# Altium PCB PDP_V2_AUTO.PcbDoc
Units mil, origin at the board's own origin, x right, y up, seen from the top; angles counter-clockwise.
Board outline 5460 x 4800 mil, 2 copper layers (Top Layer, Bottom Layer); 52 components, 42 nets, 329 pads, 35 vias.
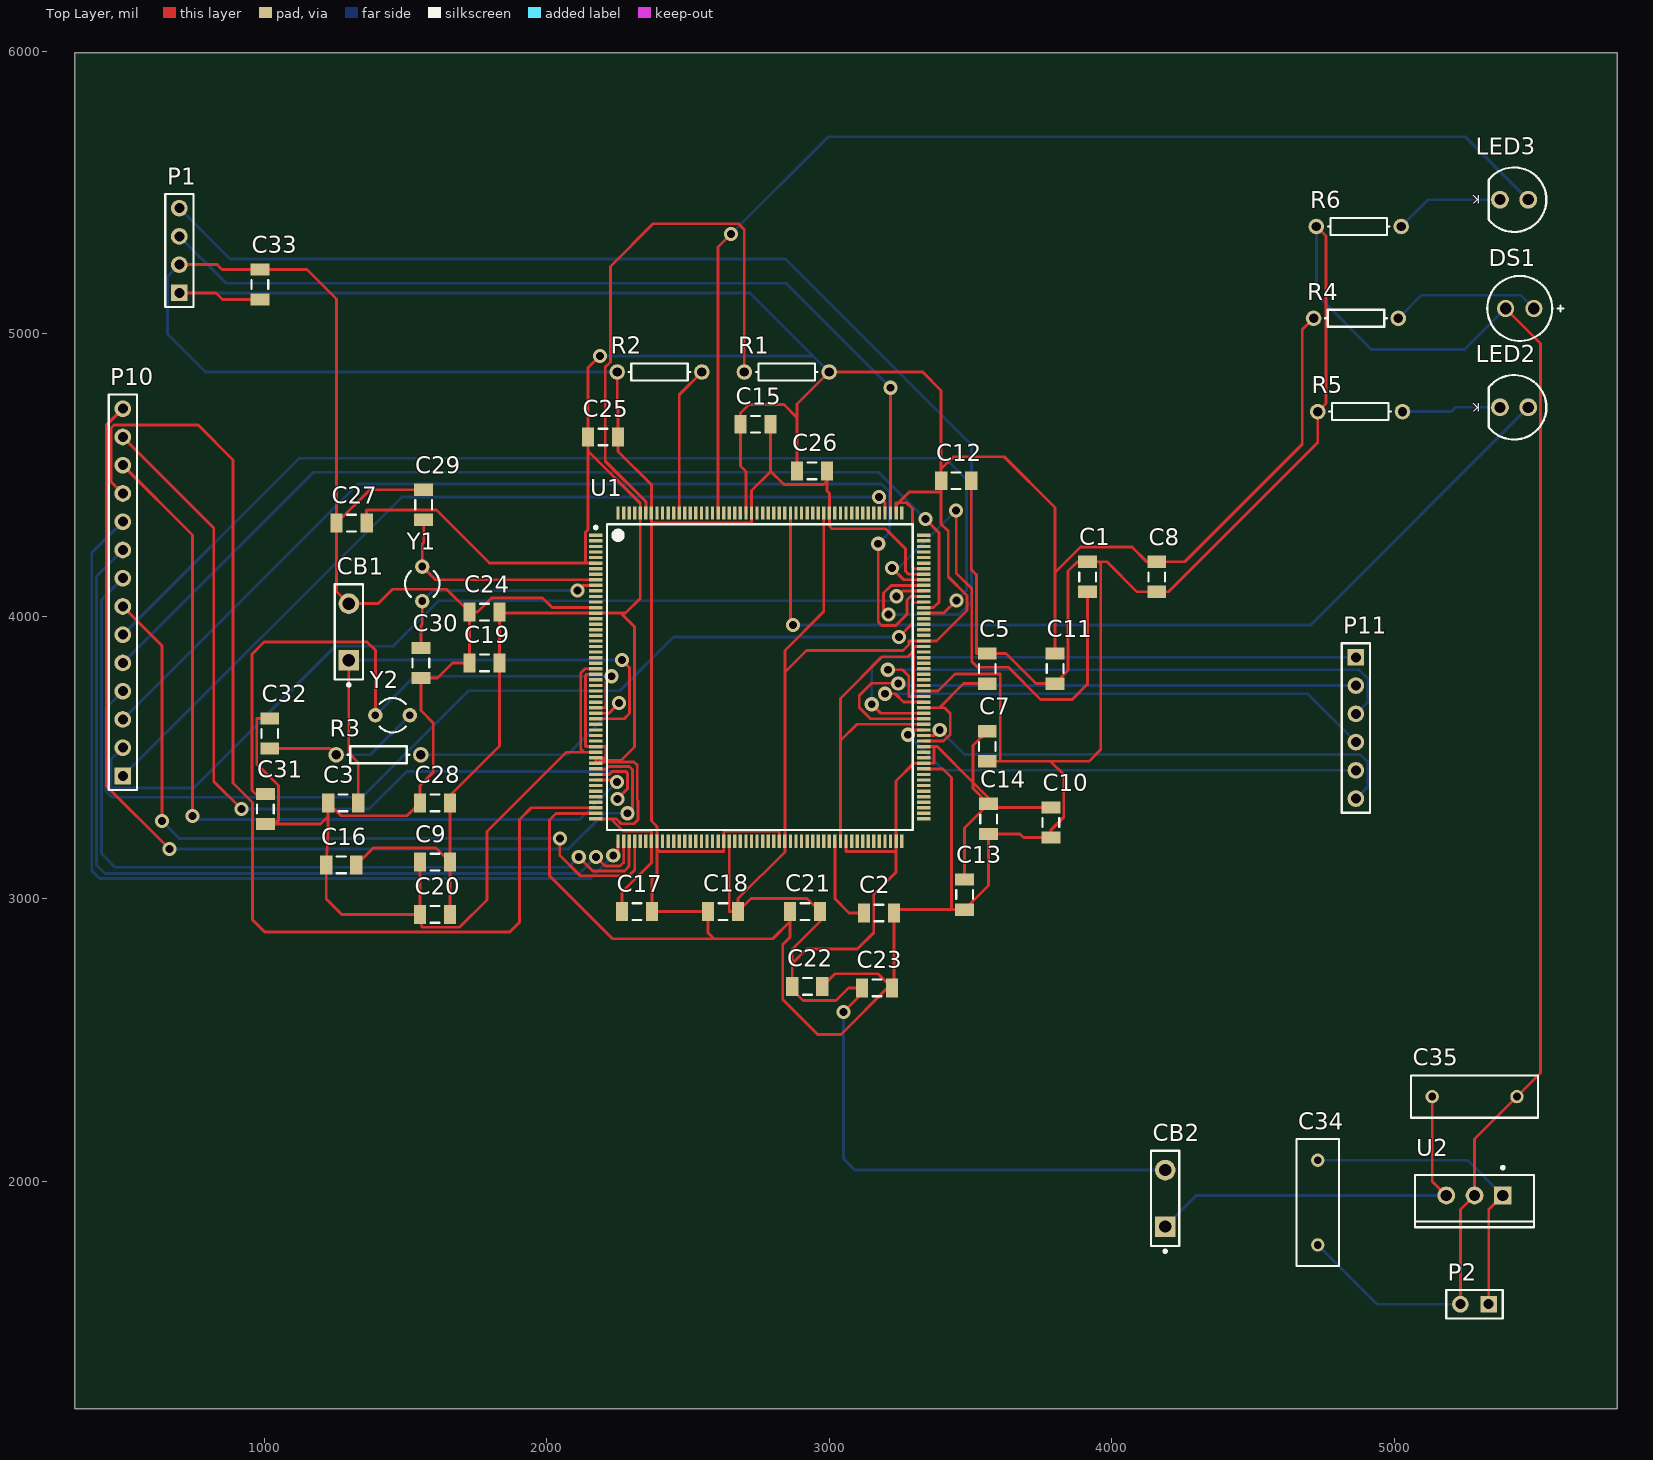
[diagram p0: Top Layer view]
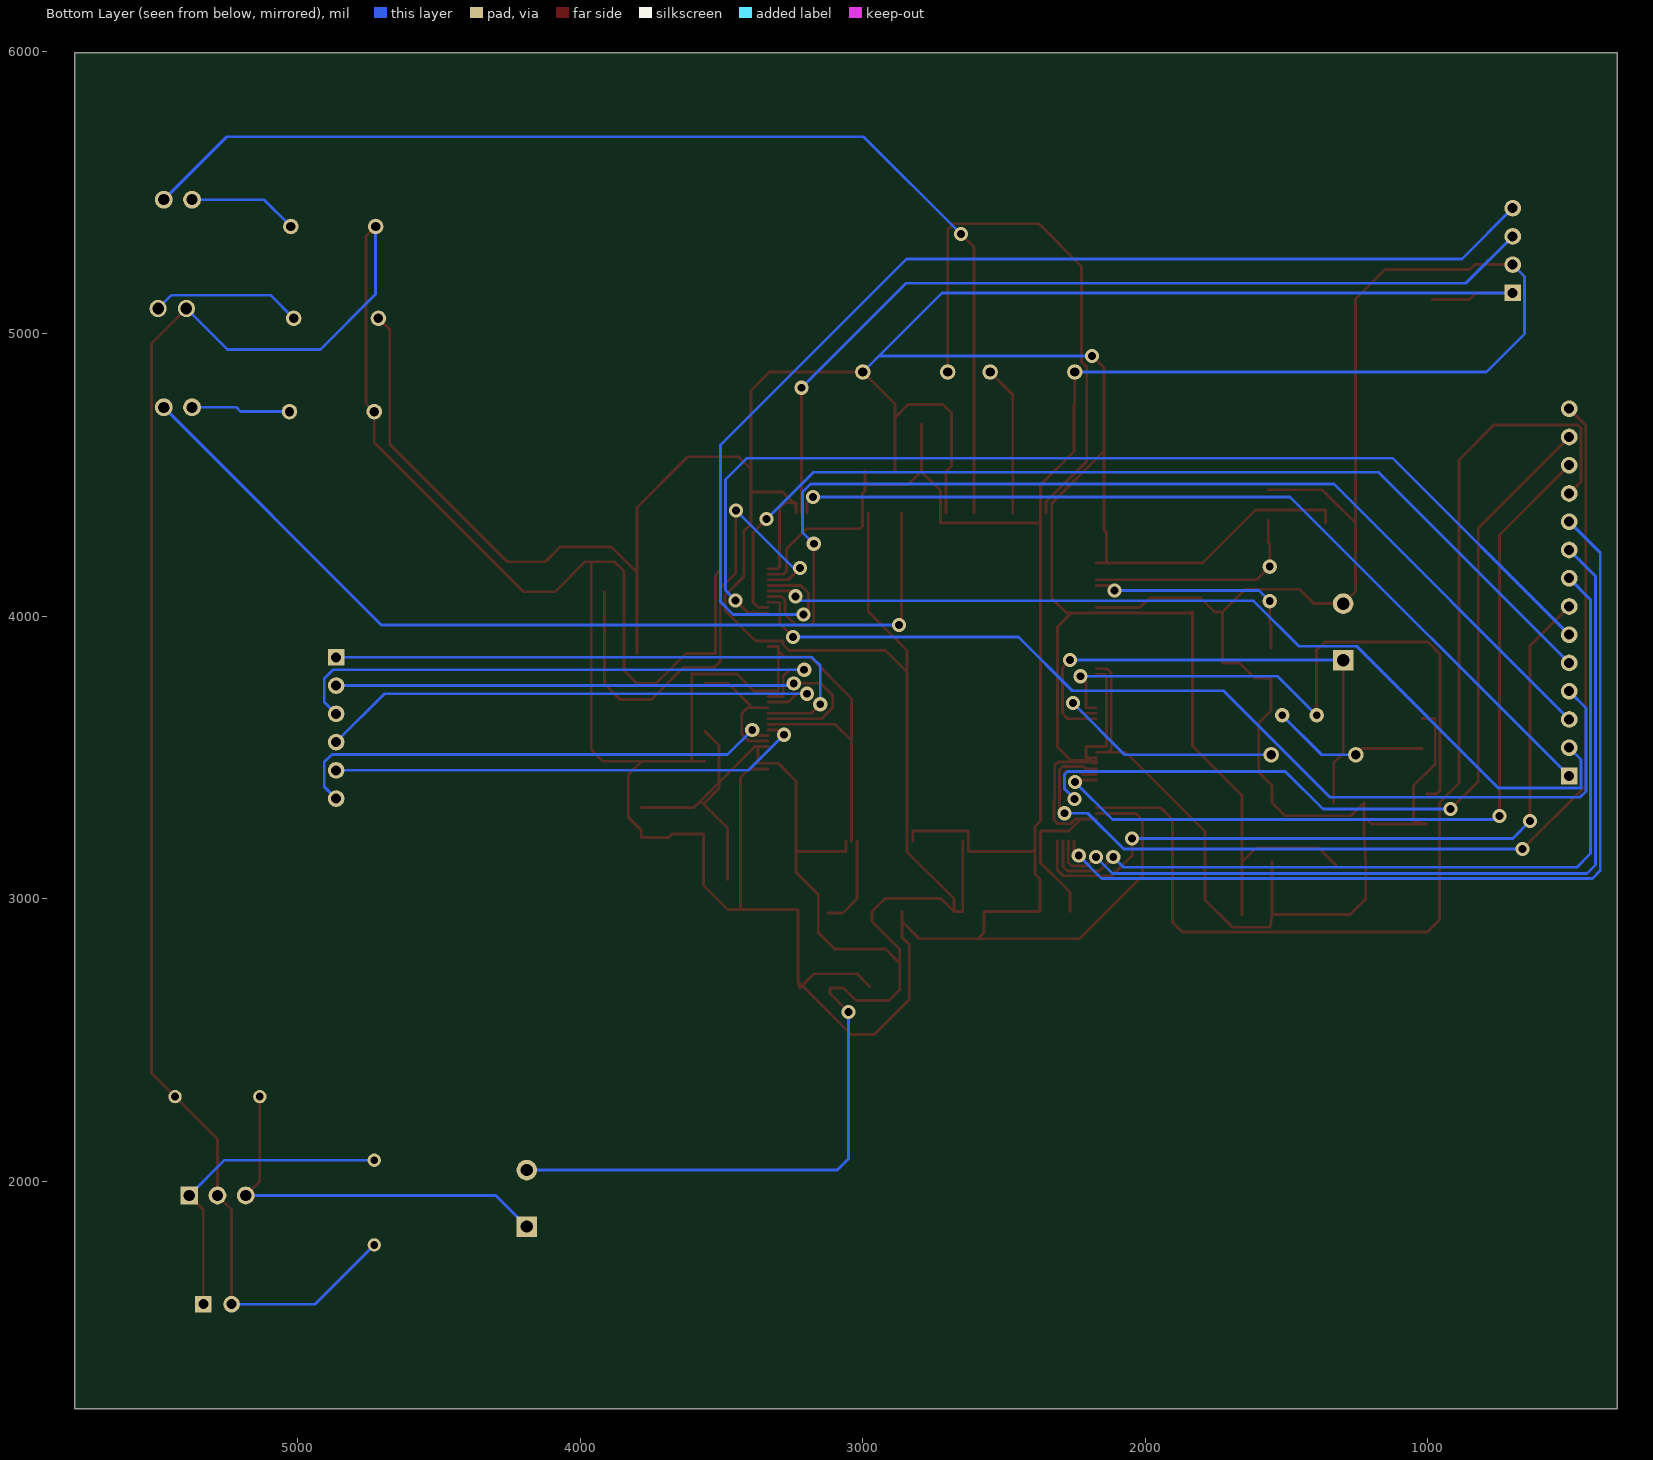
[diagram p1: Bottom Layer view, seen from below]

## Layer stack, top to bottom
Top Solder: solder mask 0.4, Solder Resist, Dk 3.5
Top Layer: signal copper 1.4
Dielectric 1: dielectric 12.6, FR-4, Dk 4.8
Bottom Layer: signal copper 1.4
Bottom Solder: solder mask 0.4, Solder Resist, Dk 3.5

## Board outline
330,1195 5790,1195 5790,5995 330,5995

## Design rules (kind name [scope] priority, off if disabled: settings)
Clearance [All] p1: gap=7 ignorepadtopadclearanceinfootprint=FALSE except(0: Arc-Hole Track-Hole SMDPad-Hole THPad-Hole Via-Hole Fill-Hole Poly-Hole Region-Hole Text-Hole)
PolygonConnect [All] p1: connectstyle=Relief reliefconductorwidth=10 reliefentries=4 polygonreliefangle="90 Angle" airgapwidth=10
RoutingVias [All] p1: holewidth=28 width=50 viastyle="Through Hole" minholewidth=28 minwidth=50 maxholewidth=28 maxwidth=50
SolderMaskExpansion [All] p1: expansion=4
Width [All] p1: maxlimit=10 minlimit=10 preferedwidth=10
30 further rules are at their usual default settings.

## Components (designator, comment, footprint, x,y, rotation, side; value= is the part's Value field where it differs from the comment)
C1 "VCAP2" C1206 3915,4140 r90 top value=2.2uF
C2 "VCAP1" C1206 3176.85,2950 r0 top value=2.2uF
C3 "NRST Cap" C1206 1280,3340 r0 top value=0.1uF
C5 "DSI_Filter2" C1206 3560,3815 r270 top value=2.2uF
C7 "DSI_Filter3" C1206 3560,3540 r90 top value=100nF
C8 "DSI_Filter3" C1206 4160,4140 r90 top value=100nF
C9 "DSI_Filter3" C1206 1605,3130 r0 top value=100nF
C10 "DSI_Filter3" C1206 3785,3270 r90 top value=100nF
C11 "DSI_Filter3" C1206 3800,3815 r90 top value=100nF
C12 "DSI_Filter3" C1206 3450,4480 r180 top value=100nF
C13 "DSI_Filter3" C1206 3480,3015 r90 top value=100nF
C14 "DSI_Filter3" C1206 3565,3283.15 r90 top value=100nF
C15 "DSI_Filter3" C1206 2740,4680 r180 top value=100nF
C16 "DSI_Filter3" C1206 1273.15,3120 r0 top value=100nF
C17 "DSI_Filter3" C1206 2320,2955 r180 top value=100nF
C18 "DSI_Filter3" C1206 2625,2955 r0 top value=100nF
C19 "DSI_Filter3" C1206 1780,3835 r0 top value=100nF
C20 "DSI_Filter3" C1206 1605,2945 r0 top value=100nF
C21 "DSI_Filter3" C1206 2915,2955 r0 top value=100nF
C22 "DSI_Filter3" C1206 2923.15,2690 r180 top value=100nF
C23 "DSI_Filter3" C1206 3170,2685 r180 top value=100nF
C24 "DSI_Filter3" C1206 1780,4015 r0 top value=100nF
C25 "DSI_Filter3" C1206 2200,4635 r180 top value=100nF
C26 "DSI_Filter3" C1206 2940,4515 r180 top value=100nF
C27 "DSI_Filter3" C1206 1310,4330 r0 top value=4.7uF
C28 "DSI_Filter3" C1206 1605,3340 r0 top value=1uF
C29 "DSI_Filter3" C1206 1565,4395 r90 top value=12.5pF
C30 "DSI_Filter3" C1206 1555,3835 r270 top value=12.5pF
C31 "DSI_Filter3" C1206 1005,3318.15 r90 top value=18pF
C32 "DSI_Filter3" C1206 1020,3585 r270 top value=18pF
C33 "DSI_Filter3" C1206 985,5175 r270 top value=100nF
C34 "Cap" RAD-0.3 4730,1925 r90 top value=0.47uF
C35 "Cap" RAD-0.3 5285,2300 r180 top value=33uF
CB1 "Reset Button" SPST-2 1300,3945 r90 top
CB2 "REG_PWR" SPST-2 4190,1940 r90 top
DS1 "PWR_LED" AVAG-HLMP-4740 5445,5090 r180 top
LED2 "STATUS1" "Type 5mm" 5425,4740 r180 top
LED3 "STATUS2" "Type 5mm" 5425,5475 r180 top
P1 "Header 4" HDR1X4 700,5145 r90 top
P2 "Header 2" HDR1X2 5335,1565 r180 top
P10 "Header 14" HDR1X14 500,3435 r90 top
P11 "Header 6" HDR1X6 4865,3855 r270 top
R1 "PDR_Pullup" AXIAL-0.3 2850,4865 r0 top value=10K
R2 "BOOT_Pulldown" AXIAL-0.3 2400,4865 r0 top value=10K
R3 "Inverter_Lim" AXIAL-0.3 1405,3510 r0 top value=100
R4 "Inverter_Lim" AXIAL-0.3 4865,5055 r0 top value=100
R5 "Inverter_Lim" AXIAL-0.3 4880,4725 r180 top value=100
R6 "Inverter_Lim" AXIAL-0.3 4875,5380 r180 top value=100
U1 "STM32F769BIT6" STM-LQFP208_V 2755,3785 r0 top
U2 "LM3940IT-3.3" NDE0003A 5285,1950 r180 top
Y1 "XTAL 32.768 kHz" R38 1560,4115 r0 top
Y2 "XTAL 25 MHz" R38 1455,3650 r90 top

## Footprints (in the part's own frame and the unit in brackets; to place one, negate y for a bottom-side part, rotate by r counter-clockwise, add the part's x,y. Pads: shape width x height; smd on the part's side, far side on the other; paste and mask are expansions set on the pad)
AVAG-HLMP-4740 [mm] "THD, 2-Leads, Dia 5.845mm, Pitch 2.54mm"
  round 1.55 hole 1.05: 1(-1.27,0) 2(1.27,0)
  silkscreen extent -3.92,-2.92 2.92,2.92
AXIAL-0.3 [mm] "Axial Device, Thru-Hole; 2 Leads; 0.3 in Pin Spacing"
  round 1.4 hole 0.85: 1(-3.81,0) 2(3.81,0)
  silkscreen extent -2.77,-0.76 2.77,0.76
C1206 [mm] "Chip Capacitor, Body 3.2x1.6mm, IPC High Density"
  rect 1.1x1.7 smd: 1(-1.35,0) 2(1.35,0)
  silkscreen extent -0.4,-0.75 0.4,0.75, body extent -1.7,-0.9 1.7,0.9, height 1.3
HDR1X2 [mm] "Connector; Header; 2 Position"
  rect 1.5x1.5 hole 0.9: 1(0,0)
  round 1.5 hole 0.9: 2(2.54,0)
  silkscreen extent -1.27,-1.27 3.81,1.27
HDR1X4 [mm] "Connector; Header; 4 Position"
  rect 1.5x1.5 hole 0.9: 1(0,0)
  round 1.5 hole 0.9: 2(2.54,0) 3(5.08,0) 4(7.62,0)
  silkscreen extent -1.27,-1.27 8.89,1.27
HDR1X6 [mm] "Connector; Header; 6 Position"
  rect 1.5x1.5 hole 0.9: 1(0,0)
  round 1.5 hole 0.9: 2(2.54,0) 3(5.08,0) 4(7.62,0) 5(10.16,0) 6(12.7,0)
  silkscreen extent -1.27,-1.27 13.97,1.27
HDR1X14 [mm] "Connector; Header; 14 Position"
  rect 1.5x1.5 hole 0.9: 1(0,0)
  round 1.5 hole 0.9: 2(2.54,0) 3(5.08,0) 4(7.62,0) 5(10.16,0) 6(12.7,0) 7(15.24,0) 8(17.78,0) 9(20.32,0) 10(22.86,0) 11(25.4,0) 12(27.94,0) 13(30.48,0) 14(33.02,0)
  silkscreen extent -1.27,-1.27 34.29,1.27
NDE0003A [mm] "FM, 3-Leads, Body 10.7x4.7mm, Pitch 2.54mm"
  rect 1.6x1.6 hole 1: 1(-2.54,0)
  round 1.6 hole 1: 2(0,0) 3(2.54,0)
  silkscreen extent -5.35,-2.62 5.35,2.85, body extent -5.4,-1.9 5.4,2.9, height 19.4
R38 [mm] "Crystal, Thru-Hole; 2 Leads; Body 3.1 x 8.2 mm (Dia.xH)"
  round 1.3 hole 0.7: 1(0,1.55) 2(0,-1.55)
  silkscreen extent -1.55,-1.19 1.55,1.17
RAD-0.3 [mm] "Radial Cap, Thru-Hole; 2 Leads; 0.3 in Pin Spacing"
  round 1.2 hole 0.7: 1(-3.81,0) 2(3.81,0)
  silkscreen extent -5.71,-1.91 5.71,1.91
SPST-2 [mm] "Switch; 2 Leads"
  rect 1.85x1.85 hole 1.1: 1(-2.54,0)
  round 1.85 hole 1.1: 2(2.54,0)
  silkscreen extent -4.89,-1.27 4.28,1.27
STM-LQFP208_V [mm] "QFP, 208-Leads, Body 28x28mm, Pitch 0.5mm"
  rect 1.2x0.3 smd: 1(-14.75,12.75) 2(-14.75,12.25) 3(-14.75,11.75) 4(-14.75,11.25) 5(-14.75,10.75) 6(-14.75,10.25) 7(-14.75,9.75) 8(-14.75,9.25) 9(-14.75,8.75) 10(-14.75,8.25) 11(-14.75,7.75) 12(-14.75,7.25) 13(-14.75,6.75) 14(-14.75,6.25) 15(-14.75,5.75) 16(-14.75,5.25) 17(-14.75,4.75) 18(-14.75,4.25) 19(-14.75,3.75) 20(-14.75,3.25) 21(-14.75,2.75) 22(-14.75,2.25) 23(-14.75,1.75) 24(-14.75,1.25) 25(-14.75,0.75) 26(-14.75,0.25) 27(-14.75,-0.25) 28(-14.75,-0.75) 29(-14.75,-1.25) 30(-14.75,-1.75) 31(-14.75,-2.25) 32(-14.75,-2.75) 33(-14.75,-3.25) 34(-14.75,-3.75) 35(-14.75,-4.25) 36(-14.75,-4.75) 37(-14.75,-5.25) 38(-14.75,-5.75) 39(-14.75,-6.25) 40(-14.75,-6.75) 41(-14.75,-7.25) 42(-14.75,-7.75) 43(-14.75,-8.25) 44(-14.75,-8.75) 45(-14.75,-9.25) 46(-14.75,-9.75) 47(-14.75,-10.25) 48(-14.75,-10.75) 49(-14.75,-11.25) 50(-14.75,-11.75) 51(-14.75,-12.25) 52(-14.75,-12.75) 105(14.75,-12.75) 106(14.75,-12.25) 107(14.75,-11.75) 108(14.75,-11.25) 109(14.75,-10.75) 110(14.75,-10.25) 111(14.75,-9.75) 112(14.75,-9.25) 113(14.75,-8.75) 114(14.75,-8.25) 115(14.75,-7.75) 116(14.75,-7.25) 117(14.75,-6.75) 118(14.75,-6.25) 119(14.75,-5.75) 120(14.75,-5.25) 121(14.75,-4.75) 122(14.75,-4.25) 123(14.75,-3.75) 124(14.75,-3.25) 125(14.75,-2.75) 126(14.75,-2.25) 127(14.75,-1.75) 128(14.75,-1.25) 129(14.75,-0.75) 130(14.75,-0.25) 131(14.75,0.25) 132(14.75,0.75) 133(14.75,1.25) 134(14.75,1.75) 135(14.75,2.25) 136(14.75,2.75) 137(14.75,3.25) 138(14.75,3.75) 139(14.75,4.25) 140(14.75,4.75) 141(14.75,5.25) 142(14.75,5.75) 143(14.75,6.25) 144(14.75,6.75) 145(14.75,7.25) 146(14.75,7.75) 147(14.75,8.25) 148(14.75,8.75) 149(14.75,9.25) 150(14.75,9.75) 151(14.75,10.25) 152(14.75,10.75) 153(14.75,11.25) 154(14.75,11.75) 155(14.75,12.25) 156(14.75,12.75)
  rect 0.3x1.2 smd: 53(-12.75,-14.75) 54(-12.25,-14.75) 55(-11.75,-14.75) 56(-11.25,-14.75) 57(-10.75,-14.75) 58(-10.25,-14.75) 59(-9.75,-14.75) 60(-9.25,-14.75) 61(-8.75,-14.75) 62(-8.25,-14.75) 63(-7.75,-14.75) 64(-7.25,-14.75) 65(-6.75,-14.75) 66(-6.25,-14.75) 67(-5.75,-14.75) 68(-5.25,-14.75) 69(-4.75,-14.75) 70(-4.25,-14.75) 71(-3.75,-14.75) 72(-3.25,-14.75) 73(-2.75,-14.75) 74(-2.25,-14.75) 75(-1.75,-14.75) 76(-1.25,-14.75) 77(-0.75,-14.75) 78(-0.25,-14.75) 79(0.25,-14.75) 80(0.75,-14.75) 81(1.25,-14.75) 82(1.75,-14.75) 83(2.25,-14.75) 84(2.75,-14.75) 85(3.25,-14.75) 86(3.75,-14.75) 87(4.25,-14.75) 88(4.75,-14.75) 89(5.25,-14.75) 90(5.75,-14.75) 91(6.25,-14.75) 92(6.75,-14.75) 93(7.25,-14.75) 94(7.75,-14.75) 95(8.25,-14.75) 96(8.75,-14.75) 97(9.25,-14.75) 98(9.75,-14.75) 99(10.25,-14.75) 100(10.75,-14.75) 101(11.25,-14.75) 102(11.75,-14.75) 103(12.25,-14.75) 104(12.75,-14.75) 157(12.75,14.75) 158(12.25,14.75) 159(11.75,14.75) 160(11.25,14.75) 161(10.75,14.75) 162(10.25,14.75) 163(9.75,14.75) 164(9.25,14.75) 165(8.75,14.75) 166(8.25,14.75) 167(7.75,14.75) 168(7.25,14.75) 169(6.75,14.75) 170(6.25,14.75) 171(5.75,14.75) 172(5.25,14.75) 173(4.75,14.75) 174(4.25,14.75) 175(3.75,14.75) 176(3.25,14.75) 177(2.75,14.75) 178(2.25,14.75) 179(1.75,14.75) 180(1.25,14.75) 181(0.75,14.75) 182(0.25,14.75) 183(-0.25,14.75) 184(-0.75,14.75) 185(-1.25,14.75) 186(-1.75,14.75) 187(-2.25,14.75) 188(-2.75,14.75) 189(-3.25,14.75) 190(-3.75,14.75) 191(-4.25,14.75) 192(-4.75,14.75) 193(-5.25,14.75) 194(-5.75,14.75) 195(-6.25,14.75) 196(-6.75,14.75) 197(-7.25,14.75) 198(-7.75,14.75) 199(-8.25,14.75) 200(-8.75,14.75) 201(-9.25,14.75) 202(-9.75,14.75) 203(-10.25,14.75) 204(-10.75,14.75) 205(-11.25,14.75) 206(-11.75,14.75) 207(-12.25,14.75) 208(-12.75,14.75)
  silkscreen extent -14.87,-13.75 13.75,13.75, body extent -15,-15 15,15, height 1.6
"Type 5mm" [mm] "THT, LED-5mm, 2pin- Body 5.8mm"
  round 1.6 hole 1: 1(1.27,0) 2(-1.27,0)
  silkscreen extent -2.9,-2.9 2.29,2.9, body extent -2.9,-2.9 2.5,2.9, height 11.7

## Part data
C1 C2 C3 C5 C7 C8 C9 C10 C11 C12 C13 C14 C15 C16 C17 C18 C19 C20 C21 C22 C23 C24 C25 C26 C27 C28 C29 C30 C31 C32 C33: library part "Cap Semi", "Capacitor (Semiconductor SIM Model)", LatestRevisionDate=29-May-2009, LatestRevisionNote="IPC-7351 Footprint Added.", PackageDescription="Chip Capacitor", PackageReference=C1206, Published=8-Jun-2000, Publisher="Altium Limited"
C34 C35: "Capacitor", LatestRevisionDate=17-Jul-2002, LatestRevisionNote="Re-released for DXP Platform.", PackageDescription="Radial Cap, Thru-Hole; 2 Leads; 0.3 in Pin Spacing", PackageReference=RAD-0.3, Published=8-Jun-2000, Publisher="Altium Limited"
CB1 CB2: library part "Circuit Breaker", "Circuit Breaker", LatestRevisionDate=17-Jul-2002, LatestRevisionNote="Re-released for DXP Platform.", PackageDescription="Switch; 2 Leads", PackageReference=SPST-2, Published=24-Mar-1999, Publisher="Altium Limited"
DS1: library part CMP-2000-06413-1, "T-1 3/4 (5 mm) Low Current LED Lamp, Green, 1.9 V, -20 to 100 degC, 2-Pin THD, RoHS, Bulk", Color=Green, Dominant Wavelength/Color Temperature=569nm, Manufacturer=AvagoTechnologies, Package=2T-13/4, Package Description="2-Pin Through Hole Device, Dia 5.845 mm, Pitch 2.54 mm", Package Reference=HLMP-4740, Category=LEDs, Datasheet URL=http://docs.avagotech.com/docs/AV02-1557EN, Datasheet Version=07/2014, Intensity=2.3mcd, Lens Appearance=ColoredDiffused, Lens Shape Type=Circular, Manufacturer URL=http://www.avagotech.com/, Mounting=ThroughHole, Mounting Orientation=TopMount, Mounting Technology=ThroughHole, Number of LEDs=1, Packaging=Bulk, Peak Wavelength=565nm, Pin Count=2, Rad Hard=No, Type=Uni-Color, Viewing Angle=50°
LED2 LED3: library part CMP-1489-00006-1, "THT LED round mono-color waterclear, WL-TMRW ,Blue", Emitting color=Blue, Manufacturer="Wuerth Elektronik", PartNumber=151053BS04500, ComponentLink1Description="Manufacturer URL", ComponentLink1URL=http://www.we-online.com, ComponentLink2Description=Datasheet, ComponentLink2URL=http://katalog.we-online.de/pbs/datasheet/7448042001.pdfhttp://katalog.we-online.de/pbs/datasheet/7448042001.pdfhttp://katalog.we-online.de/pbs/datasheet/7448042001.pdfhttp://katalog.we-online.de/pbs/datasheet/151053BS04500.pdf, PackageReference="Type 5mm"
P1: "Header, 4-Pin", LatestRevisionDate=17-Jul-2002, LatestRevisionNote="Re-released for DXP Platform.", Publisher="Altium Limited"
P2: "Header, 2-Pin", LatestRevisionDate=17-Jul-2002, LatestRevisionNote="Re-released for DXP Platform.", Publisher="Altium Limited"
P10: "Header, 14-Pin", LatestRevisionDate=17-Jul-2002, LatestRevisionNote="Re-released for DXP Platform.", Publisher="Altium Limited"
P11: "Header, 6-Pin", LatestRevisionDate=17-Jul-2002, LatestRevisionNote="Re-released for DXP Platform.", Publisher="Altium Limited"
R1 R2 R3 R4 R5 R6: library part Res1, "Resistor", LatestRevisionDate=17-Jul-2002, LatestRevisionNote="Re-released for DXP Platform.", PackageDescription="Axial Device, Thru-Hole; 2 Leads; 0.3 in Pin Spacing", PackageReference=AXIAL-0.3, Published=8-Jun-2000, Publisher="Altium Limited"
U1: library part CMP-2000-07163-1, "ARM-Based Cortex-M7 32 Bit MCU+FPU, 462 DMIPS, 2048 kB Flash, 512 kB SRAM, 168 I/Os, -40 to 85 degC, 208-Pin LQFP, RoHS, Tray", Manufacturer=STMicroelectronics, MCU Case Style=LQFP, Package Description="208-Pin Low Profile Quad Flat Package, 28 x 28 mm Body, 0.5 mm Pitch", Package Reference=LQFP-208, Supply Voltage Max=3.6V, Supply Voltage Min=1.7V, Architecture=ARMCortex-M7, Automotive Qualification Standard=-, CPU Speed=216MHz, Datasheet URL=http://www.st.com/resource/en/datasheet/stm32f769bi.pdf, Datasheet Version="Rev. 3, 05/2016", Embedded Interface Type=CAN,Ethernet,I2C,I2S,SPI,UART,USART,USB, Manufacturer URL=http://www.st.com/, Mounting Technology=SurfaceMount, MSL=MSL3-168hours, No. of I/O's=168I/O's, No. of Pins=208Pins, Packaging=Each, Product Range=STM32F7ARMCortex-M7Microcontrollers, Program Memory Size=2MB, RAM Memory Size=512KB, SVHC=NoSVHC(17-Dec-2015)
U2: library part CMP-0062-02465-3, "1A Low Dropout Regulator for 5V to 3.3V Conversion, 3-pin TO-220", Manufacturer="Texas Instruments", PackageTopMarking="NSUZXYTTE#*LM3940IT*-3.3 P+", PowerWise=N, ComponentLink1Description="Datasheet URL", ComponentLink1URL=http://www.ti.com/general/docs/lit/getliterature.tsp?genericPartNumber=LM3940&fileType=pdf, CompType="LDO IC", PackageDescription="TO-220, Molded, 3 Lead, Straight", PackageReference=NDE0003A, PinCount=3, RoHS=N
Y1 Y2: library part XTAL, "Crystal Oscillator", LatestRevisionDate=17-Jul-2002, LatestRevisionNote="Re-released for DXP Platform.", PackageDescription="Crystal, Thru-Hole; 2 Leads; Body 3.1 x 8.2 mm (Dia.xH)", PackageReference=R38, Published=8-Jun-2000, Publisher="Altium Limited"

## Via types
v1: diameter 50, hole 28, Top Layer to Bottom Layer, 35 vias

## Nets (pads, with @x,y where several pads share a name; then routed paths per layer and width w, separated by ;. In a path a pad name is that pad's centre, name@x,y a point inside that pad or via, vN(x,y) a via of type N, cw(c..) or ccw(c..) an arc to the next point about the centre after c; other vN are vias at no path point)
GND: C1.2 C2.2 C3.1 C5.1 C7.1 C8.1 C9.1 C10.1 C11.1 C12.1 C13.1 C14.1 C15.1 C16.1 C17.1 C18.1 C19.1 C20.1 C21.1 C22.1 C23.1 C24.1 C25.1 C26.1 C27.1 C28.1 C29.2 C30.2 C31.1 C32.1 C33.1 C34.1 C35.1 CB1.2 DS1.2 P1.2 P2.2 R2.1 R5.2 R6.2 U1.14 U1.25 U1.40 U1.51 U1.60 U1.72 U1.82 U1.93 U1.114 U1.122 U1.128 U1.136 U1.149 U1.170 U1.184 U1.202 U2.2 | length 29888.9
  Top Layer w10: P1.2 834,5245 850.85,5228.15 C33.1 1151.85,5228.15 1256.85,5123.15 C27.1 ; C32.1 974,3638.15 974,3478 1051,3401 1051,3276 C31.1 1200,3265 1226.85,3291.85 ; C9.1 C20.1 ; C29.2 1375,4448.15 C27.1 ; U1.51 2033,3302.72 2010,3279.72 2010,3082 2233,2859 2592.85,2859 ; U1.40 2131.75,3519.25 ; U1.25 2135.53,3814.53 2121,3800 2121,3530 2131.75,3519.25 ; U1.14 2020,4031.06 1986.06,4065 1805,4065 1755,4015 C24.1 ; R2.1 2250,4751.15 2253.15,4748 C25.1 2253.15,4583.99 2371.14,4466 U1.202 2371.14,4330 ; U1.82 2823.9,3240 2627.05,3240 U1.72 2627.05,3168 2400,3168 2390.83,3177.17 ; C21.1 2861.85,2920 ; C22.1 3021.3,2735 3173.15,2735 C23.1@3215.07,2693.07 ; C26.1 2993.15,4480 ; U1.93 3040.43,3560 ; U1.114 3403,3460.2 3434,3429.2 3434,2961.85 ; U1.122 3318,3617.68 3317.68,3618 3098.43,3618 3040.43,3560 ; U1.136 3300,3893.27 3300,3877 ; U1.149 3281.65,4149.17 3270.83,4160 3270.83,4239.17 3200,4310 3011.06,4310 3001.06,4320 U1.170 3001.06,4436 2993.15,4443.91 2993.15,4480 ; C12.1 3503.15,4165.89 3522,4147.04 3522,3868.15 C5.1 3626,3868.15 3732.3,3761.85 C11.1 3846,3807.85 3846,4160 3879.15,4193.15 C1.2 3955,4193.15 ; C7.1 3606,3486.85 ; R6.2 4759,5346 4759,4754 R5.2 4730,4616 4200.85,4086.85 C8.1 4090.3,4086.85 3984,4193.15 3955,4193.15 ; P2.2 5235,1900 U2.2 5285,2150 C35.1 5519,2384 5519,4966 DS1.2 ; 1226.85,3291.85 1226.85,3236.85 C16.1 1220,3000 1275,2945 C20.1 ; 1226.85,3291.85 C3.1 1272.85,3294 1505.85,3294 C28.1 1551.85,3401 1599,3448.15 1599,3623 1555,3667 C30.2 1614,3781.85 1667.15,3835 C19.1 C24.1 ; C27.1 1256.85,4088.15 CB1.2 1404,4045 1455,4096 1645.85,4096 C24.1 ; C20.1 1558.32,2899.53 1692,2899.53 1789,2996.53 1789,3238 2070.25,3519.25 2131.75,3519.25 ; 2371.14,4330 2371.14,3275.23 2390.83,3255.54 U1.60 2390.83,3177.17 ; 2371.14,4330 2725.47,4330 U1.184 2725.47,4445.32 2793.57,4513.43 ; 2390.83,3177.17 2390.83,3087.68 2373.15,3070 C17.1 C18.1 2571.85,2880 2592.85,2859 ; 2592.85,2859 2800.85,2859 2861.85,2920 ; 2793.57,4513.43 2840,4467 2980.15,4467 2993.15,4480 ; 2793.57,4513.43 2793.15,4513.85 C15.1 2793.57,4513.43 ; 2861.85,2920 2861.85,2864 2836,2838.15 2836,2644 2960,2520 3042,2520 C23.1@3215.07,2693.07 ; 3040.43,3560 3040.43,3709.43 3188,3857 3280,3857 3300,3877 ; C23.1@3215.07,2693.07 C23.1 C23.1@3230,2708 ; C23.1@3215.07,2693.07 C23.1@3230,2708 ; C23.1@3230,2708 3230,2814 C2.2 3230,2961.85 3434,2961.85 ; 3300,3877 3300,3735.79 U1.128 3386,3735.79 3446.21,3796 3606,3796 3606,3486.85 ; 3434,2961.85 C13.1 3565,3046.85 C14.1 3675,3230 3688.15,3216.85 C10.1 3785,3243 3831,3289 3831,3440 3784.15,3486.85 ; 3606,3486.85 3784.15,3486.85 ; 3784.15,3486.85 3920,3486.85 3962,3528.85 3962,4186.15 3955,4193.15
  Bottom Layer w10: P1.2 658,5203 658,5000 793,4865 R2.1 ; R6.2 4725,5140 4920,4945 5250,4945 DS1.2 ; C34.1 4940,1565 P2.2
NetC1_1: C1.1 U1.148 | length 1813.9
  Top Layer w10: v1(3223,4171) 3264.51,4129.49 U1.148 ; v1(3450,4375) 3450,4154 3505,4099 3505,3840 3525,3820 3635,3820 3749,3706 3861,3706 3915,3760 C1.1
  Bottom Layer w10: v1(3223,4171) 3246,4171 v1(3450,4375)
NetC2_1: C2.1 U1.92 | length 327.8
  Top Layer w10: U1.92 3020.75,3000.25 3071,2950 C2.1
NetC3_2: C3.2 CB1.1 U1.34 | length 1813.2
  Top Layer w10: CB1.1 1300,3516.15 1333.15,3483 C3.2 ; U1.34 2275.05,3637.36 2294,3656.32 2294,3818 v1(2267,3845)
  Bottom Layer w10: CB1.1 v1(2267,3845)
NetC29_1: C29.1 U1.9 Y1.1 | length 801.5
  Top Layer w10: C29.1 1565,4261 1560,4256 Y1.1 1606.54,4129.49 U1.9
NetC30_1: C30.1 U1.10 Y1.2 | length 805.3
  Top Layer w10: C30.1 1555,3968 1560,3973 Y1.2 ; v1(2109,4092) 2126.8,4109.8 U1.10
  Bottom Layer w10: Y1.2 1598.02,4092 v1(2109,4092)
NetC31_2: C31.2 U1.32 Y2.1 | length 2280.3
  Top Layer w10: C31.2 970,3371.3 957,3384.3 957,3866 1000,3909 1364.98,3909 1393.98,3880 Y2.1 ; U1.32 2210,3676.73 2210,3768 v1(2230,3788)
  Bottom Layer w10: Y2.1 1531.98,3788 v1(2230,3788)
NetC32_2: C32.2 R3.1 Y2.2 | length 563.1
  Top Layer w10: C32.2 1233.15,3531.85 R3.1
  Bottom Layer w10: R3.1 1376.02,3510 Y2.2
NetC35_2: C35.2 CB2.1 U2.3 | length 1411.3
  Top Layer w10: C35.2 5135,2000 U2.3
  Bottom Layer w10: CB2.1 4300,1950 U2.3
NetDS1_1: DS1.1 R4.2 | length 533.4
  Bottom Layer w10: R4.2 5097,5137 5448,5137 DS1.1
NetLED2_1: LED2.1 R5.1 | length 351.2
  Bottom Layer w10: R5.1 5203,4725 5218,4740 LED2.1
NetLED2_2: LED2.2 U1.177 | length 3320.7
  Top Layer w10: U1.177 2863.27,3979.73 v1(2873,3970)
  Bottom Layer w10: v1(2873,3970) 4705,3970 LED2.2
NetLED3_1: LED3.1 R6.1 | length 389.4
  Bottom Layer w10: R6.1 5120,5475 LED3.1
NetLED3_2: LED3.2 U1.190 | length 4063.5
  Top Layer w10: U1.190 2607.36,5307.36 v1(2653,5353)
  Bottom Layer w10: v1(2653,5353) 2998,5698 5252,5698 LED3.2
NetP10_1: P10.1 U1.160 | length 3152.1
  Top Layer w10: v1(3176.91,4423) 3197.91,4402 U1.160
  Bottom Layer w10: P10.1 1488,4423 v1(3176.91,4423)
NetP10_2: P10.2 U1.146 | length 3325.9
  Top Layer w10: v1(3239,4071) 3258.12,4090.12 U1.146
  Bottom Layer w10: P10.2 458,3493 458,3393 751,3393 1252,3894 1457,3894 1618,4055 3223,4055 v1(3239,4071)
NetP10_3: P10.3 U1.145 | length 3785.8
  Top Layer w10: v1(3174,4257) 3174,3980 3186,3968 3236.28,3968 3275.96,4007.68 3275.96,4057.96 3288.43,4070.43 U1.145
  Bottom Layer w10: P10.3 1333,4468 3186,4468 3214,4440 3214,4297 v1(3174,4257)
NetP10_4: P10.4 U1.144 | length 3611
  Top Layer w10: v1(3247,3927.27) 3294.35,3974.62 3294.35,4048.35 U1.144
  Bottom Layer w10: P10.4 441,3676 441,3380 461.24,3359.76 1346.76,3359.76 1723.69,3736.69 2259.1,3736.69 2449.67,3927.27 v1(3247,3927.27)
NetP10_5: P10.5 U1.143 | length 3564.4
  Top Layer w10: U1.143 3370.06,4031.06 3389,4050 3389,4296 v1(3341,4344)
  Bottom Layer w10: P10.5 1175,4510 3175,4510 v1(3341,4344)
NetP10_6: P10.6 U1.142 | length 3853.8
  Top Layer w10: U1.142 3406,4011.38 v1(3451,4056.38)
  Bottom Layer w10: P10.6 1125,4560 3411,4560 3487,4484 3487,4092.38 v1(3451,4056.38)
NetP10_7: P10.7 U1.56 | length 2716.2
  Top Layer w10: P10.7 639,3896 v1(639,3275) ; v1(2047,3214) 2047,3154 2119.33,3081.67 2291.07,3081.67 2312.09,3102.69 U1.56
  Bottom Layer w10: v1(639,3275) 700,3214 v1(2047,3214)
NetP10_8: P10.8 U1.55 | length 3025.8
  Top Layer w10: v1(2114,3148) 2163.33,3098.67 2275.4,3098.67 2292.4,3115.67 U1.55
  Bottom Layer w10: P10.8 424,4059 424,3160 472,3112 2078,3112 v1(2114,3148)
NetP10_9: P10.9 U1.54 | length 3150
  Top Layer w10: v1(2175,3148) 2207,3116 2260,3116 2273,3129 2273,3177 2272.72,3177.28 U1.54
  Bottom Layer w10: P10.9 407,4142 407,3120 437,3090 2117,3090 v1(2175,3148)
NetP10_10: P10.10 U1.53 | length 3230.1
  Top Layer w10: v1(2236,3153) 2253.03,3170.03 U1.53
  Bottom Layer w10: P10.10 390,4225 390,3100 418,3072 2155,3072 v1(2236,3153)
NetP10_11: P10.11 U1.50 | length 4020.5
  Top Layer w10: P10.11 458.47,4476.53 458.47,4666.47 469,4677 767,4677 890,4554 890,3410 959,3341 959,2926 1002.47,2882.53 1869.53,2882.53 1904,2917 1904,3280.4 1946,3322.4 U1.50
NetP10_12: P10.12 U1.45 | length 2986.2
  Top Layer w10: P10.12 747,4288 v1(747,3293) ; U1.45 2243.17,3420.83 v1(2250,3414)
  Bottom Layer w10: v1(747,3293) 759.36,3280.64 2116.64,3280.64 v1(2250,3414)
NetP10_13: P10.13 U1.44 | length 3244.6
  Top Layer w10: P10.13 822,4313 822,3416 v1(920,3318) ; U1.44 2222,3440.51 2232.49,3451 2282,3451 2287,3446 2287,3390 v1(2251,3354)
  Bottom Layer w10: v1(920,3318) 1372,3318 1505,3451 2276,3451 2287,3440 2287,3390 v1(2251,3354)
NetP10_14: P10.14 U1.43 | length 3649
  Top Layer w10: P10.14 441.47,4676.47 441.47,3399.53 v1(665,3176) ; U1.43 2211.22,3460.2 2219.02,3468 2293,3468 2304,3457 2304,3320 v1(2287,3303)
  Bottom Layer w10: v1(665,3176) 2077,3176 2204,3303 v1(2287,3303)
NetP11_1: P11.1 U1.124 | length 2061
  Top Layer w10: v1(3151,3689) 3182.95,3657.05 U1.124
  Bottom Layer w10: v1(3151,3689) 3151,3826 3180,3855 P11.1
NetP11_2: P11.2 U1.123 | length 2066.9
  Top Layer w10: v1(3245,3763) 3150,3763 3107,3720 3107,3677.64 3147.28,3637.36 U1.123
  Bottom Layer w10: v1(3245,3763) 3253,3755 P11.2
NetP11_3: P11.3 U1.127 | length 2064
  Top Layer w10: v1(3208,3811) 3260,3811 3282,3789 3282,3716.1 U1.127
  Bottom Layer w10: v1(3208,3811) 4876,3811 4907,3780 4907,3697 P11.3
NetP11_4: P11.4 U1.126 | length 1887.8
  Top Layer w10: v1(3198,3726) 3234.42,3726 3264,3696.42 U1.126
  Bottom Layer w10: v1(3198,3726) 4694,3726 P11.4
NetP11_5: P11.5 U1.121 | length 1699.9
  Top Layer w10: v1(3280,3581) 3296.99,3597.99 U1.121
  Bottom Layer w10: v1(3280,3581) 3406,3455 P11.5
NetP11_6: P11.6 U1.120 | length 1773.1
  Top Layer w10: U1.120 3372.31,3578.31 v1(3392,3598)
  Bottom Layer w10: v1(3392,3598) 3479,3511 4880,3511 4907,3484 4907,3397 P11.6
NetR1_1: R1.1 U1.203 | length 1990
  Top Layer w10: U1.203 2351.46,4405.54 2208,4549 2208,4883 2226,4901 2226,5239 2377,5390 2680,5390 2700,5370 R1.1
NetR2_2: R2.2 U1.197 | length 532.6
  Top Layer w10: U1.197 2469.57,4784.57 R2.2
NetR3_2: R3.2 U1.33 | length 875.4
  Top Layer w10: U1.33 2221.05,3657.05 v1(2257,3693)
  Bottom Layer w10: R3.2 2074,3510 v1(2257,3693)
SWCLK: P1.3 U1.159 | length 3183.1
  Top Layer w10: U1.159 v1(3217.6,4809.4)
  Bottom Layer w10: P1.3 866,5179 2848,5179 v1(3217.6,4809.4)
SWDIO: P1.4 U1.147 | length 4255.9
  Top Layer w10: v1(3211,4007) 3193,4025 3193,4082.8 3220,4109.8 U1.147
  Bottom Layer w10: P1.4 880,5265 2846,5265 3504.51,4606.49 3504.51,4051.51 3460,4007 v1(3211,4007)
VDD: C7.2 C8.2 C9.2 C10.2 C11.2 C12.2 C13.2 C14.2 C15.2 C16.2 C17.2 C18.2 C19.2 C20.2 C21.2 C22.2 C23.2 C24.2 C25.2 C26.2 C27.2 C28.2 C33.2 CB2.2 P1.1 R1.2 R4.1 U1.6 U1.15 U1.26 U1.39 U1.41 U1.42 U1.52 U1.59 U1.73 U1.83 U1.94 U1.103 U1.115 U1.118 U1.137 U1.150 U1.158 U1.171 U1.185 U1.204 | length 23011.2
  Top Layer w10: P1.1 830,5145 853.15,5121.85 C33.2 ; C16.2 1386.3,3180 1608.15,3180 C9.2 ; C27.2 1363.15,4376 1610,4376 1797.46,4188.54 2138,4188.54 ; C20.2 C9.2 ; C24.2 C24.2@1833.15,4011.38 ; U1.52 2228,3283.03 ; U1.26 2141.84,3794.84 2138,3791 2138,3538.94 U1.39 2210,3538.94 2210,3499.57 U1.41 U1.42 U1.42@2181,3479.88 ; U1.6 2138,4188.54 ; v1(2189,4922) 2146.85,4879.85 C25.2 2146.85,4585.15 ; C17.2 2266.85,3023.71 2371.14,3128 U1.59 2371.14,3237.86 2369,3240 2271.03,3240 2228,3283.03 ; U1.73 2646.73,2955 C18.2 ; U1.185 2705.79,4513 2686.85,4531.94 C15.2 2686.85,4720 2716.85,4750 2840,4750 2886.85,4703.15 ; C26.2 2886.85,4703.15 ; U1.171 2981.38,4016.8 2843.58,3879 2843.58,3802.58 ; v1(3051,2599) 3116.85,2664.85 C23.2 3069,2685 3024,2640 2907.82,2640 2870,2677.82 C22.2 2870,2772 ; U1.94 3060.12,3168 3237.28,3168 ; U1.158 3237.28,4393.57 ; U1.118 3372,3538.94 ; U1.150 3300,4168.86 3295,4173.86 3295,4382 3275,4402 3245.72,4402 ; C13.2 3480,3251.3 C14.2 ; C7.2 3510,3543.15 3510,3412 ; C10.2 3598.85,3323.15 C14.2@3575.35,3346.65 ; C11.2 3800,4155 ; R4.1 4675,5015 4675,4609.15 4259,4193.15 C8.2 4124.85,4193.15 4073,4245 3890,4245 3800,4155 ; C9.2 C28.2 1658.15,3366 1833.15,3541 C19.2 C24.2@1833.15,4011.38 ; C24.2@1833.15,4011.38 U1.15 2262.62,4011.38 ; 2138,4188.54 2138,4298 2146.85,4306.85 2146.85,4585.15 ; 2146.85,4585.15 2331.77,4400.23 U1.204 2331.77,4063.15 2280,4011.38 2262.62,4011.38 ; U1.42@2181,3479.88 2181,3485 U1.42@2186.12,3485 ; U1.42@2181,3479.88 U1.42@2186.12,3485 ; U1.42@2186.12,3485 2310,3485 2321,3474 2321,3351.49 2324,3348.49 2324,3279.94 2310,3265.94 2264.18,3265.94 2247.09,3283.03 2228,3283.03 ; U1.42@2186.12,3485 2192.06,3490.94 2264.94,3490.94 2311,3537 2311,3963 2262.62,4011.38 ; C18.2 2724.15,3001 2922.15,3001 C21.2 2968.15,2920.15 2870,2822 2870,2772 ; C18.2 2678.15,3001 2843.58,3166.43 U1.83 2843.58,3802.58 ; 2843.58,3802.58 2920,3879 3262,3879 3283,3900 3283,3912.95 U1.137 3380,3912.95 3488,4020.95 3488,4074 3422,4140 3422,4301.85 3396.85,4327 3396.85,4440 ; 2870,2772 2920,2822 3100,2822 3158,2880 3158,3015 3237.28,3094.28 3237.28,3168 ; 2886.85,4703.15 2886.85,4751.85 R1.2 3331.85,4865 3396.85,4800 3396.85,4521.85 ; 3237.28,3168 U1.103 3237.28,3417.17 3300,3479.88 U1.115 3372,3479.88 3372,3538.94 ; 3237.28,4393.57 3245.72,4402 ; 3237.28,4393.57 3237.28,4402 3245.72,4402 ; 3245.72,4402 3283.72,4440 3396.85,4440 ; 3372,3538.94 3383.06,3538.94 3510,3412 ; 3396.85,4440 C12.2 3396.85,4521.85 ; 3396.85,4521.85 3440,4565 3620,4565 3800,4385 3800,4155 ; 3510,3412 3510,3391.3 C14.2 ; 3510,3412 C14.2@3575.35,3346.65 ; C14.2 C14.2@3575.35,3346.65
  Bottom Layer w10: P1.1 2720,5145 2943,4922 ; v1(2189,4922) 2943,4922 ; R1.2 2943,4922 ; v1(3051,2599) 3051,2080 3091,2040 CB2.2
VDD_12_DSI: C5.2 U1.119 U1.125 | length 483.2
  Top Layer w10: U1.119 3405.59,3558.62 3429,3582.04 3429,3656.04 3408.3,3676.73 3390.88,3676.73 ; U1.125 3390.88,3676.73 ; C5.2 3476,3761.85 3390.88,3676.73
VOLT_IN: C34.2 P2.1 U2.1 | length 1112.5
  Top Layer w10: P2.1 5335,1900 U2.1
  Bottom Layer w10: C34.2 5260,2075 U2.1
pads on no net: U1.1 U1.2 U1.3 U1.4 U1.5 U1.7 U1.8 U1.11 U1.12 U1.13 U1.16 U1.17 U1.18 U1.19 U1.20 U1.21 U1.22 U1.23 U1.24 U1.27 U1.28 U1.29 U1.30 U1.31 U1.35 U1.36 U1.37 U1.38 U1.46 U1.47 U1.48 U1.49 U1.57 U1.58 U1.61 U1.62 U1.63 U1.64 U1.65 U1.66 U1.67 U1.68 U1.69 U1.70 U1.71 U1.74 U1.75 U1.76 U1.77 U1.78 U1.79 U1.80 U1.81 U1.84 U1.85 U1.86 U1.87 U1.88 U1.89 U1.90 U1.91 U1.95 U1.96 U1.97 U1.98 U1.99 U1.100 U1.101 U1.102 U1.104 U1.105 U1.106 U1.107 U1.108 U1.109 U1.110 U1.111 U1.112 U1.113 U1.116 U1.117 U1.129 U1.130 U1.131 U1.132 U1.133 U1.134 U1.135 U1.138 U1.139 U1.140 U1.141 U1.151 U1.152 U1.153 U1.154 U1.155 U1.156 U1.157 U1.161 U1.162 U1.163 U1.164 U1.165 U1.166 U1.167 U1.168 U1.169 U1.172 U1.173 U1.174 U1.175 U1.176 U1.178 U1.179 U1.180 U1.181 U1.182 U1.183 U1.186 U1.187 U1.188 U1.189 U1.191 U1.192 U1.193 U1.194 U1.195 U1.196 U1.198 U1.199 U1.200 U1.201 U1.205 U1.206 U1.207 U1.208

## Silkscreen, mask and mechanical layers (free items; w line width, h text height)
Top Paste:
  text "Ethan Peterson / ARM Development Platform MK 1" at 3930,1295 h60

## Text inside footprints (layer, text, board x,y; h text height)
LED2: Top Overlay "K" at 5305,4755 h30 r180; Mechanical 15 "K" at 5305,4755 h30 r180
LED3: Top Overlay "K" at 5305,5490 h30 r180; Mechanical 15 "K" at 5305,5490 h30 r180